# Altium PCB amir_hosein_motalebi.PcbDoc
Units mm, origin at the board's own origin, x right, y up, seen from the top; angles counter-clockwise.
Board outline 96.14 x 65.15 mm, 2 copper layers (Top Layer, Bottom Layer); 28 components, 23 nets, 119 pads, 14 vias.
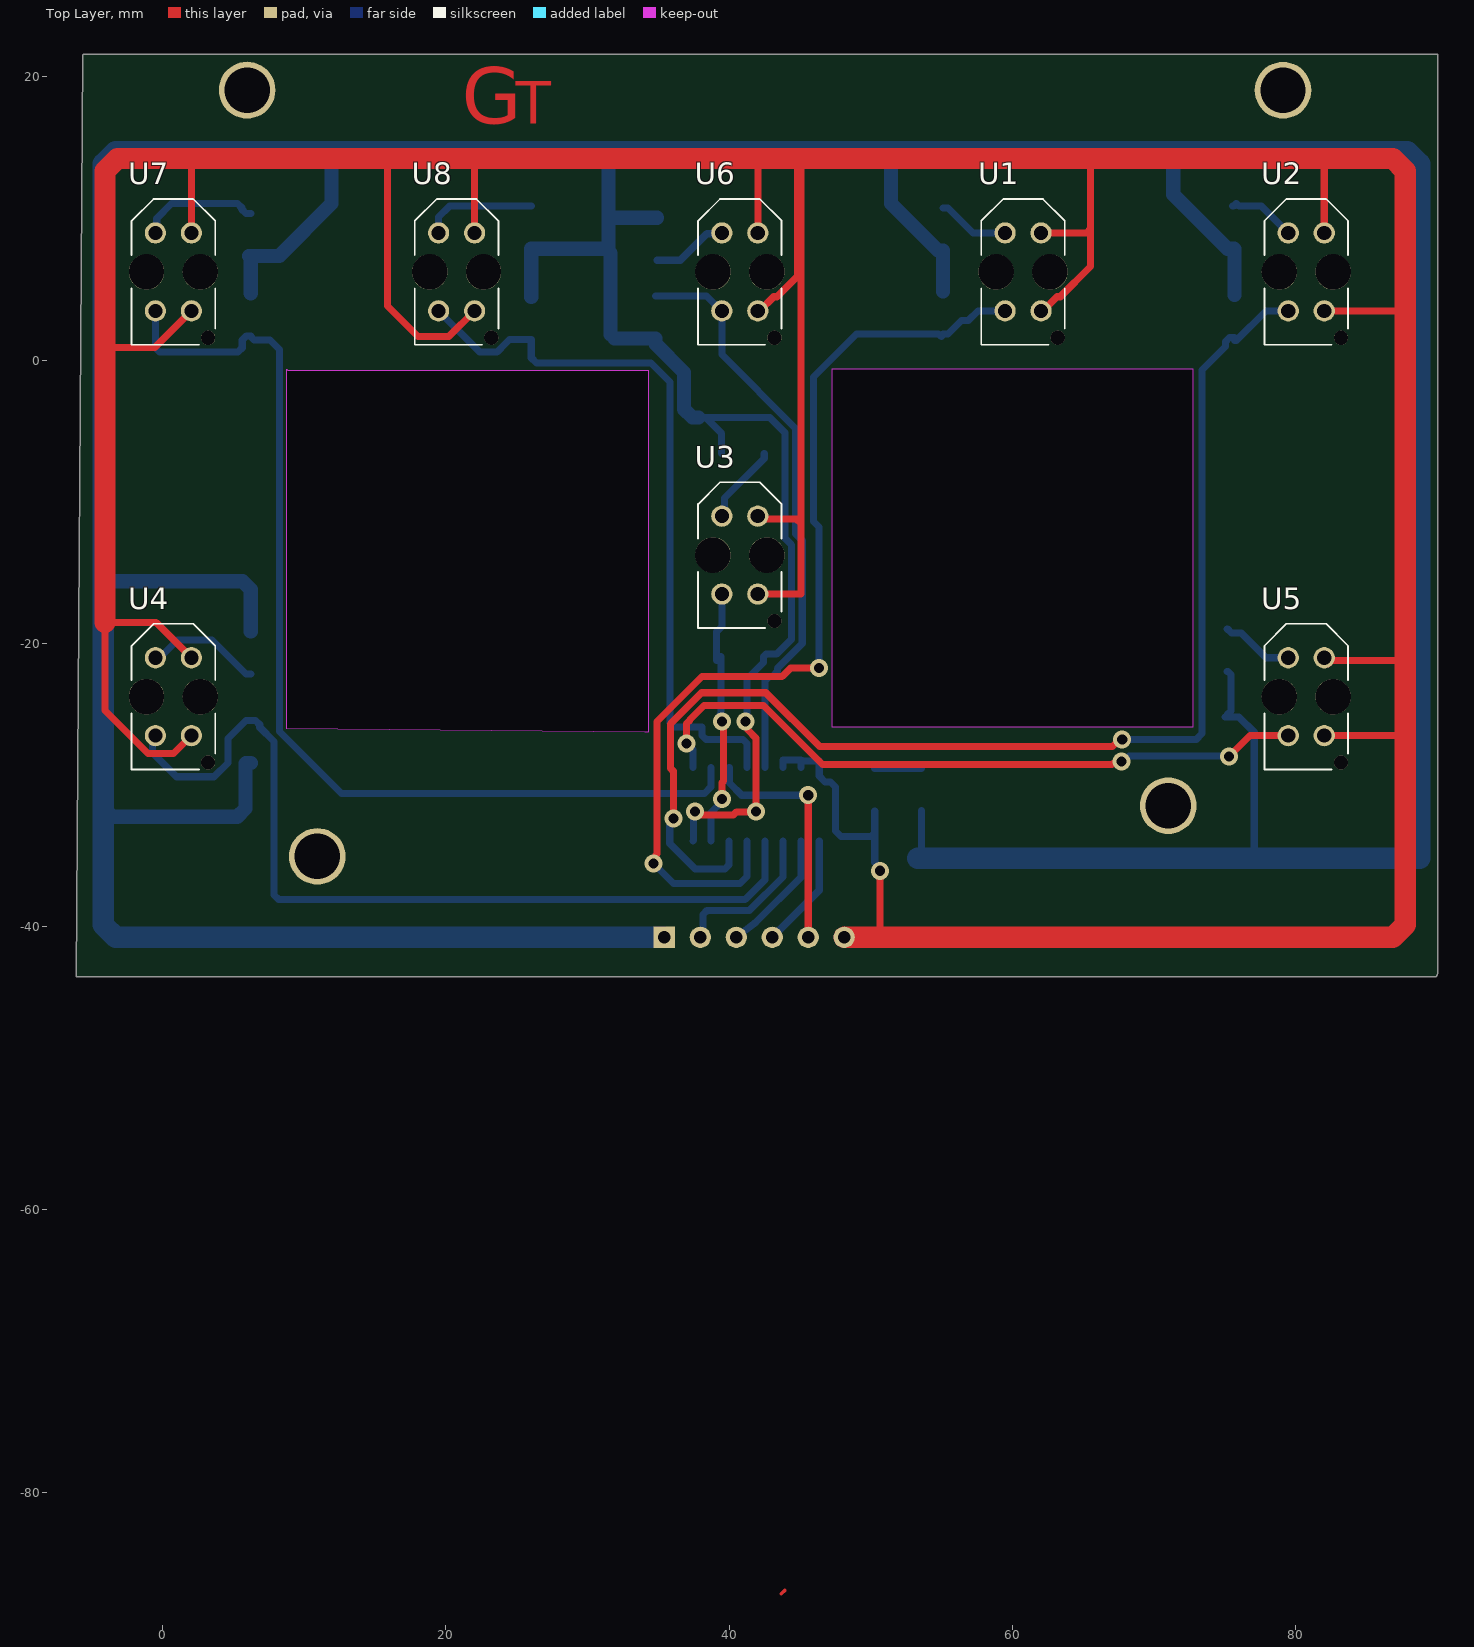
[diagram p0: Top Layer view]
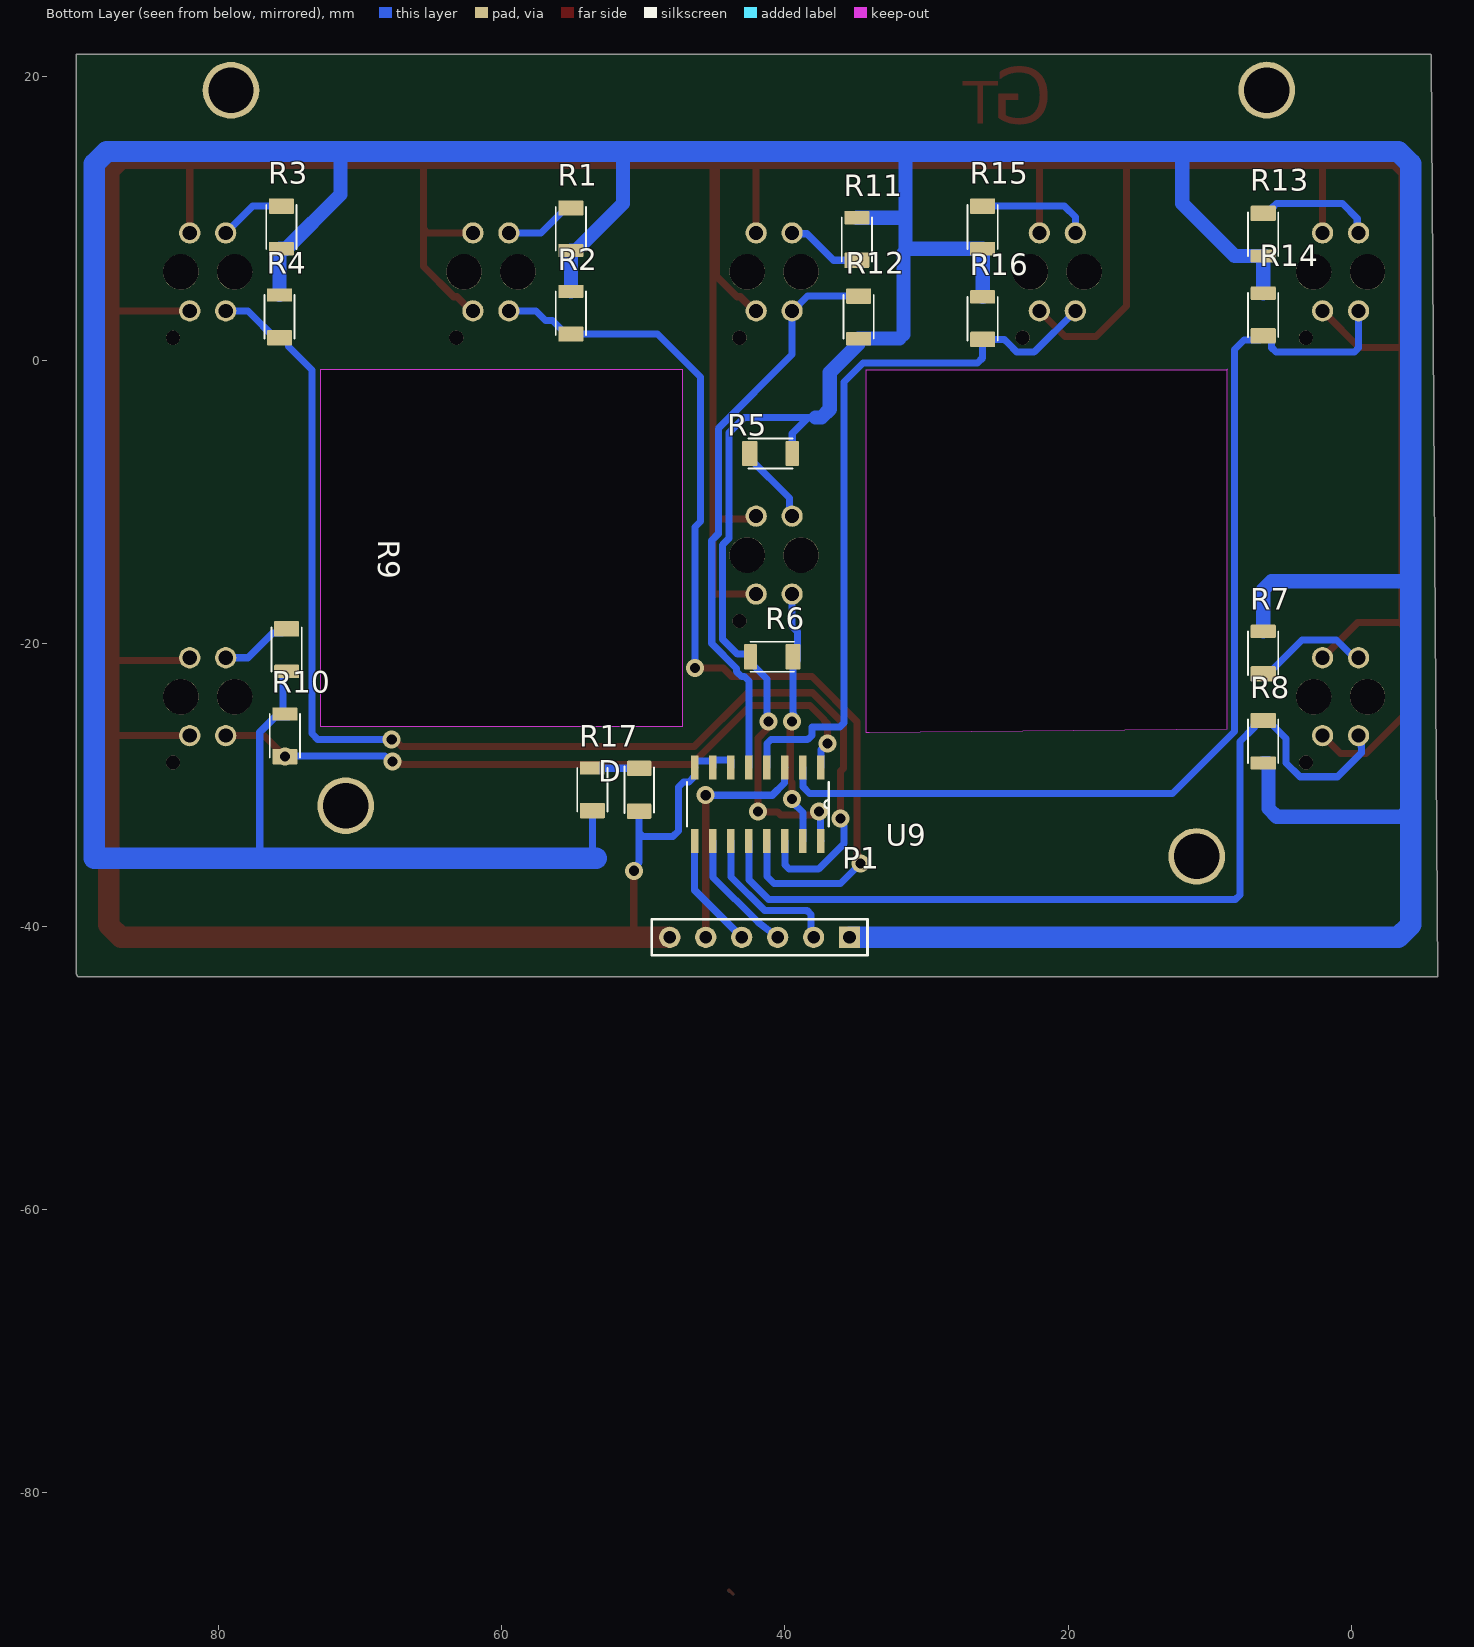
[diagram p1: Bottom Layer view, seen from below]
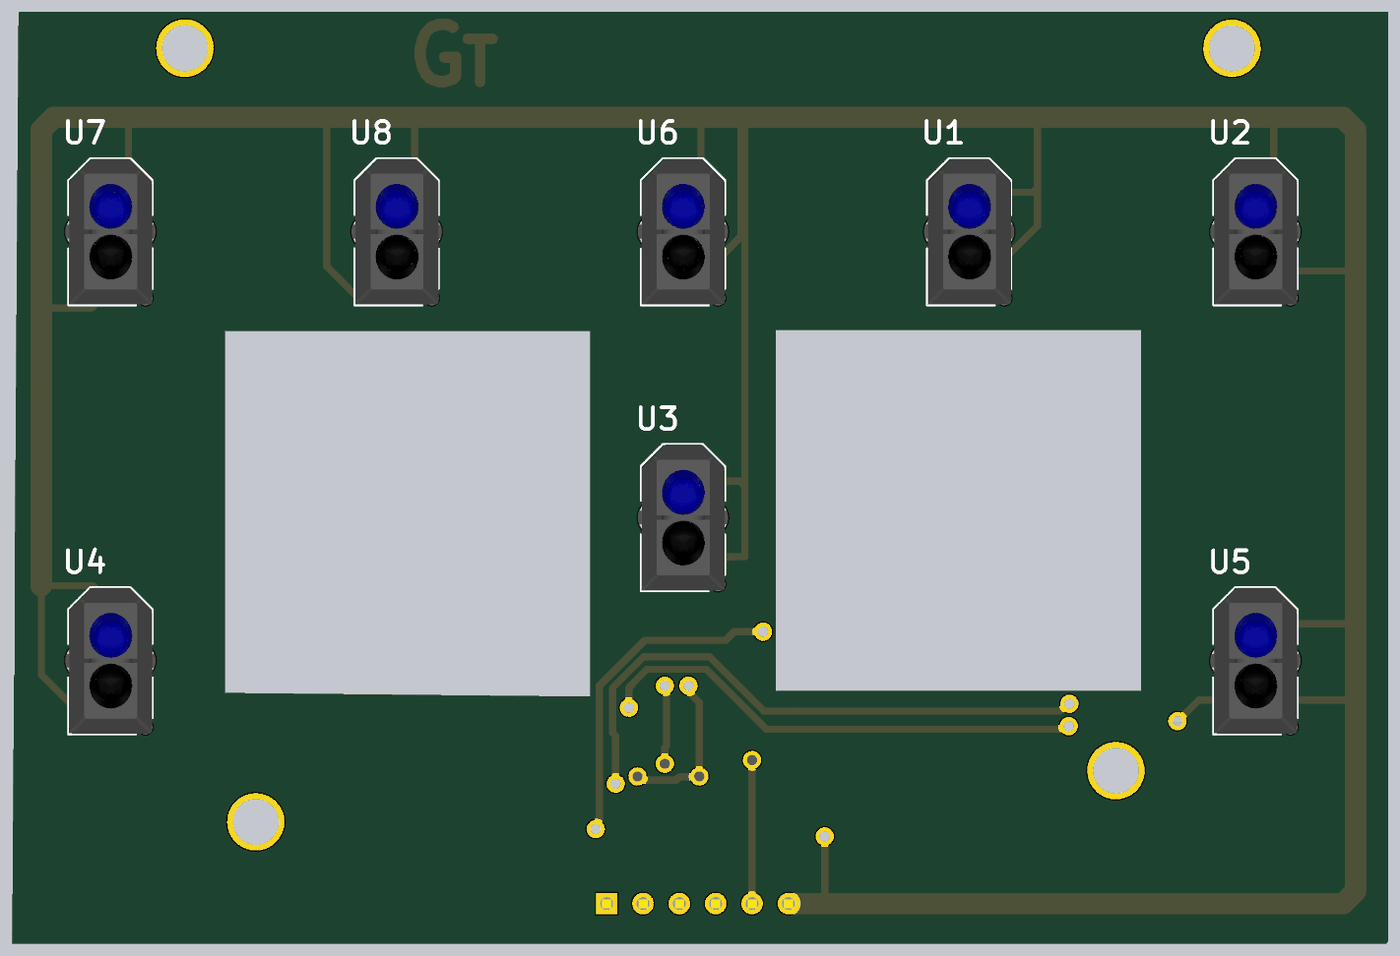
[diagram p2: 3D render of the assembled board from above, using the file's embedded part models]
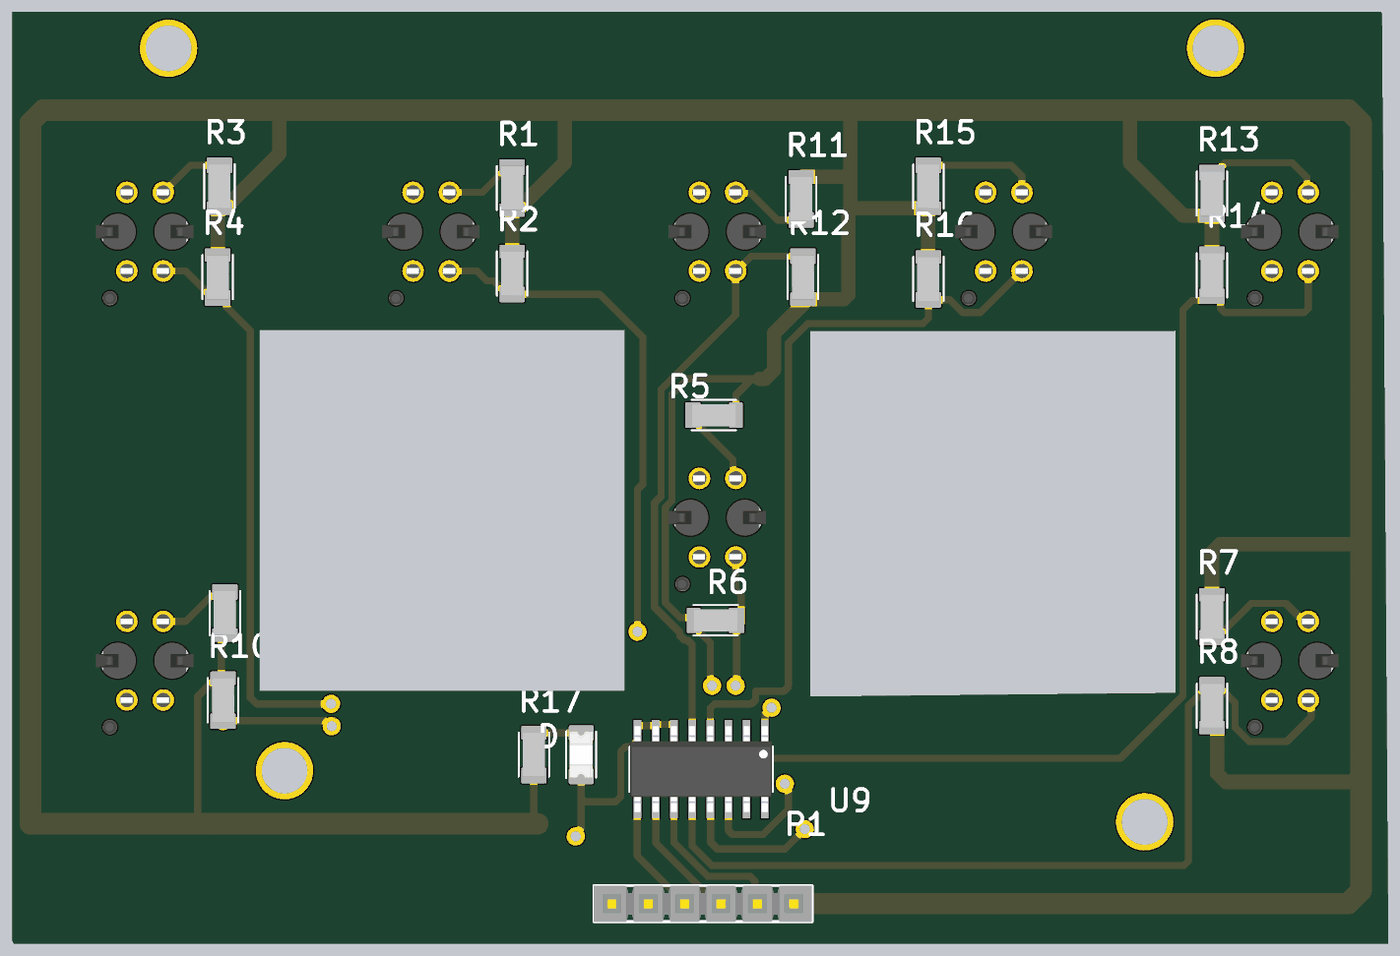
[diagram p3: 3D render of the assembled board from below, using the file's embedded part models]

## Layer stack, top to bottom
Top Solder: solder mask 0.0102, Solder Resist, Dk 3.5
Top Layer: signal copper 0.0356
Dielectric 1: dielectric 0.32, FR-4, Dk 4.8
Bottom Layer: signal copper 0.0356
Bottom Solder: solder mask 0.0102, Solder Resist, Dk 3.5

## Board outline
-6.096,-43.561 89.916,-43.561 ccw(c89.609,-43.254) 90.043,-43.254 90.043,21.59 -5.588,21.59 ccw(c-5.428,21.43) -5.654,21.43
cut-out: 47.244,-0.635 47.244,-25.908 72.771,-25.908 72.771,-0.635
cut-out: 8.763,-0.635 8.841,-0.713 34.272,-0.713 34.29,-0.732 34.29,-26.289 34.036,-26.289 8.763,-26.035

## Design rules (kind name [scope] priority, off if disabled: settings)
Clearance [All] p1: gap=0.254 ignorepadtopadclearanceinfootprint=FALSE except(0: Arc-Hole Track-Hole SMDPad-Hole THPad-Hole Via-Hole Fill-Hole Poly-Hole Region-Hole Text-Hole)
PolygonConnect [All] p1: connectstyle=Relief reliefconductorwidth=0.254 reliefentries=4 polygonreliefangle="90 Angle" airgapwidth=0.254
RoutingVias [All] p1: holewidth=0.711 width=1.27 viastyle="Through Hole" minholewidth=0.711 minwidth=1.27 maxholewidth=0.711 maxwidth=1.27
SolderMaskExpansion [All] p1: expansion=0.102 istentingtop=FALSE
Width [All] p1: maxlimit=2 minlimit=0.5 preferedwidth=1 minimp=50.000000 maximp=50.000000 favimp=50.000000
30 further rules are at their usual default settings.

## Components (designator, comment, footprint, x,y, rotation, side; value= is the part's Value field where it differs from the comment)
D "LTST-C230KFKT" LEDC3216X110 50.292,-30.353 r270 bottom
P1 "Header 6" HDR1X6 35.433,-40.767 r0 bottom
R1 "4-1879462-2" RESC3115X65N 55.118,9.271 r270 bottom
R2 "4-1879462-2" RESC3115X65N 55.118,3.302 r90 bottom
R3 "4-1879462-2" RESC3115X65N 75.565,9.398 r270 bottom
R4 "4-1879462-2" RESC3115X65N 75.692,3.048 r90 bottom
R5 "4-1879462-2" RESC3115X65N 41.021,-6.604 r180 bottom
R6 "4-1879462-2" RESC3115X65N 40.894,-20.955 r0 bottom
R7 "4-1879462-2" RESC3115X65N 6.223,-20.701 r90 bottom
R8 "4-1879462-2" RESC3115X65N 6.223,-26.924 r270 bottom
R9 "4-1879462-2" RESC3115X65N 75.184,-20.447 r270 bottom
R10 "4-1879462-2" RESC3115X65N 75.311,-26.543 r90 bottom
R11 "4-1879462-2" RESC3115X65N 34.925,8.509 r90 bottom
R12 "4-1879462-2" RESC3115X65N 34.798,3.048 r270 bottom
R13 "4-1879462-2" RESC3115X65N 6.223,8.89 r270 bottom
R14 "4-1879462-2" RESC3115X65N 6.223,3.175 r90 bottom
R15 "4-1879462-2" RESC3115X65N 26.035,9.398 r270 bottom
R16 "4-1879462-2" RESC3115X65N 26.035,2.921 r90 bottom
R17 "4-1879462-2" RESC3115X65N 53.594,-30.353 r90 bottom
U1 "TCRT5000" OPTO_TCRT5000 60.762,6.223 r90 top
U2 "TCRT5000" OPTO_TCRT5000 80.762,6.223 r90 top
U3 "TCRT5000" OPTO_TCRT5000 40.762,-13.777 r90 top
U4 "TCRT5000" OPTO_TCRT5000 0.762,-23.777 r90 top
U5 "TCRT5000" OPTO_TCRT5000 80.762,-23.777 r90 top
U6 "TCRT5000" OPTO_TCRT5000 40.762,6.223 r90 top
U7 "TCRT5000" OPTO_TCRT5000 0.762,6.223 r90 top
U8 "TCRT5000" OPTO_TCRT5000 20.762,6.223 r90 top
U9 "74HC4051D" SOIC127P600X175-16N 41.91,-31.369 r270 bottom

## Footprints (in the part's own frame and the unit in brackets; to place one, negate y for a bottom-side part, rotate by r counter-clockwise, add the part's x,y. Pads: shape width x height; smd on the part's side, far side on the other; paste and mask are expansions set on the pad)
HDR1X6 [mm] "Connector; Header; 6 Position"
  rect 1.5x1.5 hole 0.9: 1(0,0)
  round 1.5 hole 0.9: 2(2.54,0) 3(5.08,0) 4(7.62,0) 5(10.16,0) 6(12.7,0)
  silkscreen extent -1.27,-1.27 13.97,1.27, body extent -1.26,-1.25 13.98,1.29, height 8.38
LEDC3216X110 [mm]
  rrect20% 1.1x1.73 smd: A(1.51,0) C(-1.51,0)
  silkscreen extent -1.65,-1.04 1.65,1.04, body extent -1.6,-0.8 1.6,0.8, height 1.1
OPTO_TCRT5000 [mm]
  round 1.5 hole 1: A(2.75,1.27) CATH(2.75,-1.27) COLL(-2.75,1.27) E(-2.75,-1.27)
  round 1 hole 1 unplated: ""(-4.65,-2.45)
  round 2.5 hole 2.5 unplated: ""(0,1.9) ""(0,-1.9)
  silkscreen extent -5.15,-2.95 5.15,2.95, body extent -5.1,-3.43 5.1,3.37, height 7.2
RESC3115X65N [mm]
  rrect14% 1.09x1.77 smd: 1(-1.465,0)
  rrect14% 0.94x1.77 smd: 2(1.54,0)
  silkscreen extent -1.55,-1.06 1.55,1.06, body extent -1.55,-0.77 1.55,0.77, height 0.53
SOIC127P600X175-16N [mil]
  rect 67x21 smd: 1(-102,175) 2(-102,125) 3(-102,75) 4(-102,25) 5(-102,-25) 6(-102,-75) 7(-102,-125) 8(-102,-175) 9(102,-175) 10(102,-125) 11(102,-75) 12(102,-25) 13(102,25) 14(102,75) 15(102,125) 16(102,175)
  silkscreen extent -62,-197 62,197, body extent -118,-195 118,195, height 69

## Part data
D: "Orange 605nm LED Indication - Discrete 2V 1206 (3216 Metric)", Package="1206 Lite-On", Availability=Unavailable, MF="Lite-On Inc.", MP=LTST-C230KFKT, Price=None, SnapEDA_Link=https://www.snapeda.com/parts/LTST-C230KFKT/Lite-On%20Inc./view-part/353318/?ref=snap
P1: "Header, 6-Pin", LatestRevisionDate=17-Jul-2002, LatestRevisionNote="Re-released for DXP Platform.", Publisher="Altium Limited"
R1 R2 R3 R4 R5 R6 R7 R8 R9 R10 R11 R12 R13 R14 R15 R16 R17: "RES 0.82 OHM 1% 1/4W 1206", Package=1206, Power_Rating=".25 W", Resistance=82, Tolerance=1%, Availability="In Stock", Check_prices=https://www.snapeda.com/parts/4-1879462-2/TE+Connectivity/view-part/?ref=eda, EU_RoHS_Compliance="Compliant with Exemptions", MF="TE Connectivity", MP=4-1879462-2, Price=None, SnapEDA_Link=https://www.snapeda.com/parts/4-1879462-2/TE+Connectivity/view-part/?ref=snap
U1 U2 U3 U4 U5 U6 U7 U8: "950 nm 60 mA Through Hole Reflective Optical Sensor with Transistor Output", Package=None, Availability=Unavailable, MP=TCRT5000, Price=None
U9: "1 Circuit IC Switch 8:1 130Ohm 16-SOIC", Package="SOIC-16 Toshiba", Availability="In Stock", Check_prices=https://www.snapeda.com/parts/74HC4051D/Toshiba/view-part/?ref=eda, MF=Toshiba, MP=74HC4051D, Price=None, Purchase-URL=https://pricing.snapeda.com/search/part/74HC4051D/?ref=eda, SnapEDA_Link=https://www.snapeda.com/parts/74HC4051D/Toshiba/view-part/?ref=snap

## Free pads (board coordinates)
  round 4 hole 3.2: ""(5.969,19.05) ""(5.971,19.067) ""(10.922,-35.052) ""(71.017,-31.472) ""(79.121,19.05)

## Via types
v1: diameter 1.27, hole 0.711, Top Layer to Bottom Layer, 14 vias

## Nets (pads, with @x,y where several pads share a name; then routed paths per layer and width w, separated by ;. In a path a pad name is that pad's centre, name@x,y a point inside that pad or via, vN(x,y) a via of type N, cw(c..) or ccw(c..) an arc to the next point about the centre after c; other vN are vias at no path point)
5: P1.1 R1.2 R2.2 R3.2 R4.2 R5.2 R6.2 R7.2 R8.2 R9.2 R10.2 R11.2 R12.2 R13.2 R14.2 R15.2 R16.2 R17.1 U9.16 | length 435.8
  Top Layer w0.5: v1@37.465,-32.131 40.298,-32.131 40.525,-31.904 41.883,-31.904 v1(41.91,-31.877) 41.91,-26.713 41.295,-26.098 41.295,-25.674 v1(41.148,-25.527)
  Bottom Layer w0.5: 31.3,7.858 31.496,7.662 31.623,7.535 ; 31.623,1.801 31.916,1.508 ; R12.2@34.798,1.143 R12.2 ; U9.16 37.482,-33.943 v1@37.482,-32.131 ; 37.846,-4.064 38.354,-4.064 ; R5.2 39.481,-5.191 38.354,-4.064 ; v1@41.275,-25.146 41.275,-22.529 42.434,-21.37 R6.2 42.615,-20.774 43.361,-20.774 44.416,-19.719 44.416,-13.05 43.95,-12.584 43.95,-5.138 42.876,-4.064 38.354,-4.064 ; 53.594,-35.433 53.594,-35.189 R17.1 ; R10.2@75.023,-25.223 75.218,-25.223 76.023,-25.223 77.089,-26.289 77.089,-35.189 ; R9.2 75.218,-21.987 75.438,-22.207 75.438,-24.783 R10.2@75.218,-25.003
  Bottom Layer w1: -4.191,-31.623 -3.556,-32.258 5.268,-32.258 5.854,-31.672 5.854,-28.494 5.884,-28.464 R8.2 ; -4.191,-15.367 -3.937,-15.621 5.637,-15.621 6.223,-16.207 R7.2 ; R13.2@6.096,7.35 R13.2@6.193,7.35 ; R14.2 6.223,7.32 R13.2@6.193,7.35 ; 11.938,14.732 11.938,11.049 8.239,7.35 R13.2 R13.2@6.193,7.35 ; R16.2 R15.2 31.3,7.858 ; 31.496,7.662 31.496,10.16 ; 31.496,14.732 31.496,10.16 ; 31.623,1.801 31.623,7.535 ; 31.916,1.508 R12.2 ; R12.2@34.798,1.143 36.83,-0.889 36.83,-3.478 37.416,-4.064 37.846,-4.064 ; R11.2 31.607,10.049 31.496,10.16 ; 51.435,14.732 51.435,11.059 54.763,7.731 R1.2 R2.2 ; 71.374,14.732 71.374,11.694 75.21,7.858 R3.2 75.662,7.858 75.692,7.828 R4.2
  Bottom Layer w1.5: P1.1 -3.312,-40.767 -4.191,-39.888 -4.191,-32.258 -4.191,-31.623 -4.191,-15.367 -4.191,13.853 -3.312,14.732 11.938,14.732 31.496,14.732 51.435,14.732 71.374,14.732 87.894,14.732 88.773,13.853 88.773,-35.189 77.089,-35.189 53.594,-35.189 53.33,-35.189
  other v1: 37.592,-31.877
GND: D.A P1.6 U1.CATH U1.E U2.CATH U2.E U3.CATH U3.E U4.CATH U4.E U5.CATH U5.E U6.CATH U6.E U7.CATH U7.E U8.CATH U8.E U9.6 U9.7 U9.8 | length 391.2
  Top Layer w0.5: -4.064,0.889 -0.552,0.889 1.861,3.302 2.032,3.302 U7.E ; U4.E 0.778,-27.781 -1.027,-27.781 -4.064,-24.744 -4.064,-18.542 -0.453,-18.542 U4.CATH ; U7.CATH 2.032,14.224 ; 15.875,14.224 15.875,3.81 18.034,1.651 20.21,1.651 U8.E ; 21.463,14.224 22.032,13.655 U8.CATH ; U3.E 44.261,-16.527 44.278,-16.51 45.085,-16.51 45.085,-11.557 ; U3.CATH 42.223,-11.218 44.746,-11.218 45.085,-11.557 ; U6.E 42.161,3.473 43.157,4.469 43.389,4.469 44.831,5.911 44.831,14.224 45.085,13.97 45.085,-11.557 ; U6.CATH 42.032,13.965 42.291,14.224 ; v1@50.526,-35.961 50.419,-36.068 v1@50.581,-36.23 ; 50.673,-40.259 v1(50.673,-36.068) ; U1.E@61.937,3.473 U1.E 62.161,3.473 63.157,4.469 63.389,4.469 65.532,6.612 65.532,9.271 ; U1.CATH 62.032,9.073 62.103,9.144 62.274,8.973 65.234,8.973 65.532,9.271 ; 65.532,14.224 65.532,9.271 ; U5.E 87.138,-26.527 87.757,-25.908 ; U5.CATH 82.032,-21.199 82.296,-21.463 82.55,-21.209 87.757,-21.209 ; U2.E 87.42,3.473 87.757,3.81 ; U2.CATH 82.032,13.833 82.423,14.224
  Top Layer w1.5: -4.064,-18.542 -4.064,0.889 -4.064,13.345 -3.185,14.224 2.032,14.224 15.875,14.224 21.463,14.224 42.291,14.224 44.831,14.224 65.532,14.224 82.423,14.224 86.878,14.224 87.757,13.345 87.757,3.81 87.757,-21.209 87.757,-25.908 87.757,-39.888 86.878,-40.767 P1.6
  Bottom Layer w0.5: U9.6 43.815,-28.249 43.832,-28.232 45.068,-28.232 45.085,-28.249 U9.7 ; U9.7@45.085,-28.321 U9.8@46.372,-28.321 ; U9.8 46.372,-28.761 U9.8@46.372,-28.321 ; D.A 50.292,-33.401 ; v1(50.673,-36.068) 50.673,-35.86 50.292,-35.479 50.292,-33.401 ; U1.CATH@61.976,9.017 62.02,8.973 U1.CATH ; U9.8@46.372,-28.321 46.372,-29.379 46.782,-29.79 47.168,-29.79 47.522,-30.143 47.522,-33.259 47.918,-33.655 50.038,-33.655 50.292,-33.401
NetD_C: D.C R17.2 | length 3.3
  Bottom Layer w0.5: D.C 50.307,-28.828 53.579,-28.828 R17.2
NetR1_1: R1.1 U1.A | length 5.3
  Bottom Layer w0.5: R1.1 55.458,10.736 57.221,8.973 59.265,8.973 59.436,9.144 59.492,9.088 U1.A
NetR3_1: R3.1 U2.A | length 4.9
  Bottom Layer w0.5: R3.1 75.633,10.863 75.819,11.049 76.005,10.863 77.602,10.863 U2.A
NetR5_1: R5.1 U3.A | length 5.7
  Bottom Layer w0.5: U3.A 39.683,-10.836 39.683,-9.747 42.486,-6.944 R5.1
NetR7_1: R7.1 U4.A | length 8.2
  Bottom Layer w0.5: U4.A -0.317,-20.836 -0.008,-20.836 1.055,-19.773 3.49,-19.773 5.883,-22.166 R7.1
NetR9_1: R9.1 U5.A | length 5.2
  Bottom Layer w0.5: R9.1 75.479,-19.277 76.173,-19.277 77.923,-21.027 U5.A
NetR11_1: R11.1 U6.A | length 5.4
  Bottom Layer w0.5: R11.1 36.56,7.044 38.43,8.914 39.433,8.914 U6.A
NetR13_1: R13.1 U7.A | length 8.5
  Bottom Layer w0.5: U7.A -0.414,9.067 -0.414,10 0.635,11.049 5.295,11.049 5.588,10.756 5.588,10.65 5.883,10.355 R13.1
NetR15_1: R15.1 U8.A | length 8
  Bottom Layer w0.5: U8.A 19.492,10.094 20.261,10.863 R15.1
out: P1.5 U9.3 | length 17.1
  Top Layer w0.5: P1.5 v1(45.593,-30.734)
  Bottom Layer w0.5: U9.3 40.022,-28.795 40.022,-29.862 40.894,-30.734 v1(45.593,-30.734)
s0: P1.2 U9.11 | length 11
  Bottom Layer w0.5: P1.2 38.164,-40.576 38.164,-39.155 38.457,-38.862 41.452,-38.862 43.815,-36.499 U9.11
s1: P1.3 U9.10 | length 8.8
  Bottom Layer w0.5: P1.3 41.913,-39.692 45.068,-36.537 45.068,-33.977 U9.10
s2: P1.4 U9.9 | length 8.2
  Bottom Layer w0.5: P1.4 46.372,-37.448 U9.9@46.372,-33.985
Y0: R2.1 U1.COLL U9.13 | length 69.4
  Top Layer w0.5: v1(34.671,-35.56) 34.818,-35.413 34.818,-34.989 34.925,-34.882 34.925,-25.527 38.1,-22.352 43.754,-22.352 44.357,-21.75 v1(46.355,-21.75)
  Bottom Layer w0.5: v1(34.671,-35.56) 36.068,-36.957 40.767,-36.957 41.258,-36.466 41.258,-33.977 U9.13 ; v1(46.355,-21.75) 46.355,-11.795 45.974,-11.414 45.974,-1.192 49.003,1.837 54.805,1.837 54.991,1.651 55.118,1.778 R2.1 55.458,1.837 56.415,2.794 56.896,2.794 57.575,3.473 U1.COLL
Y1: R4.1 U2.COLL U9.14 | length 89.2
  Top Layer w0.5: v1(36.064,-32.385) 36.064,-29.038 35.855,-28.829 35.855,-25.69 38.05,-23.495 42.595,-23.495 46.405,-27.305 67.089,-27.305 67.597,-26.797 v1(67.767,-26.797)
  Bottom Layer w0.5: v1@35.814,-32.893 35.814,-34.139 37.616,-35.941 39.712,-35.941 40.005,-35.648 U9.14 ; v1(67.767,-26.797) 72.994,-26.797 73.406,-26.385 73.406,-0.703 75.057,0.948 75.057,1.288 75.352,1.583 R4.1 75.692,1.397 75.846,1.397 77.922,3.473 U2.COLL
Y2: R6.1 U3.COLL U9.15 | length 18.2
  Top Layer w0.5: v1(39.497,-30.988) 39.497,-29.845 39.624,-29.718 39.624,-25.654 v1(39.497,-25.527)
  Bottom Layer w0.5: U9.15 38.735,-31.958 39.497,-31.196 v1(39.497,-30.988) ; v1@39.37,-25.019 39.429,-24.96 R6.1 39.175,-21.209 39.116,-21.209 39.116,-19.191 39.492,-18.815 U3.COLL
Y3: R8.1 U4.COLL U9.12 | length 62.9
  Bottom Layer w0.5: U4.COLL -0.699,-26.718 -0.699,-27.305 -0.714,-27.32 -0.714,-27.734 0.983,-29.431 3.628,-29.431 4.608,-28.451 4.608,-26.734 5.883,-25.459 6.563,-25.459 6.858,-25.754 6.858,-25.936 7.874,-26.952 7.874,-37.784 8.198,-38.108 41.14,-38.108 42.545,-36.703 U9.12
Y4: R10.1 U5.COLL U9.1 | length 49
  Top Layer w0.5: v1(36.994,-27.069) 36.994,-25.671 37.231,-25.434 37.231,-25.38 38.223,-24.388 42.422,-24.388 46.609,-28.575 67.04,-28.575 67.109,-28.506 67.571,-28.506 v1(67.718,-28.359) ; v1(75.311,-28.008) 76.792,-26.527 U5.COLL
  Bottom Layer w0.5: v1(36.994,-27.069) 37.021,-27.069 37.448,-27.497 37.448,-28.761 U9.1 ; v1(67.718,-28.359) 67.862,-28.359 68.246,-27.974 75.277,-27.974 v1(75.311,-28.008)
Y5: R12.1 U6.COLL U9.5 | length 40.9
  Bottom Layer w0.5: R12.1 38.411,4.513 39.451,3.473 U6.COLL 39.492,0.386 44.704,-4.826 44.704,-12.272 45.17,-12.738 45.17,-20.031 43.408,-21.793 43.408,-22.01 43.074,-22.344 42.857,-22.344 42.545,-22.656 U9.5
Y6: R14.1 U7.COLL U9.2 | length 73.6
  Bottom Layer w0.5: U7.COLL -0.508,0.862 -0.215,0.569 5.332,0.569 5.625,0.862 5.625,1.415 5.92,1.71 R14.1 6.223,1.651 6.459,1.415 7.581,1.415 8.259,0.737 8.259,-26.244 12.622,-30.607 38.267,-30.607 38.735,-30.139 U9.2
Y7: R16.1 U8.COLL U9.4 | length 52.1
  Bottom Layer w0.5: U8.COLL 22.396,0.569 23.628,0.569 24.216,1.157 24.216,1.163 24.509,1.456 R16.1 26.035,0.161 26.405,-0.209 34.48,-0.209 35.826,-1.555 35.826,-25.615 36.119,-25.908 38.1,-25.908 38.1,-26.504 38.393,-26.797 40.982,-26.797 41.275,-27.09 U9.4
pads on no net: U1. U2. U3. U4. U5. U6. U7. U8.
copper on no net: | length 0.4
  Top Layer w0.254: 43.693,-87.122 43.947,-86.868

## Other copper
Top Layer:
  text "G" at 21.12,16.675 h4
  text "T" at 24.93,16.675 h3

## Silkscreen, mask and mechanical layers (free items; w line width, h text height)
Mechanical 1:
  circle w0.254: c79.121,19.05 r1.65
  circle w0.254: c6,19.05 r1.65
  circle w0.254: c70.993,-31.496 r1.65
  circle w0.254: c10.953,-35.052 r1.65